# Altium PCB Smart Smoke Detector.PcbDoc
Units mm, origin at the board's own origin, x right, y up, seen from the top; angles counter-clockwise.
Board outline 55.7 x 68.7 mm, 2 copper layers (Top Layer, Bottom Layer); 40 components, 24 nets, 144 pads, 43 vias.
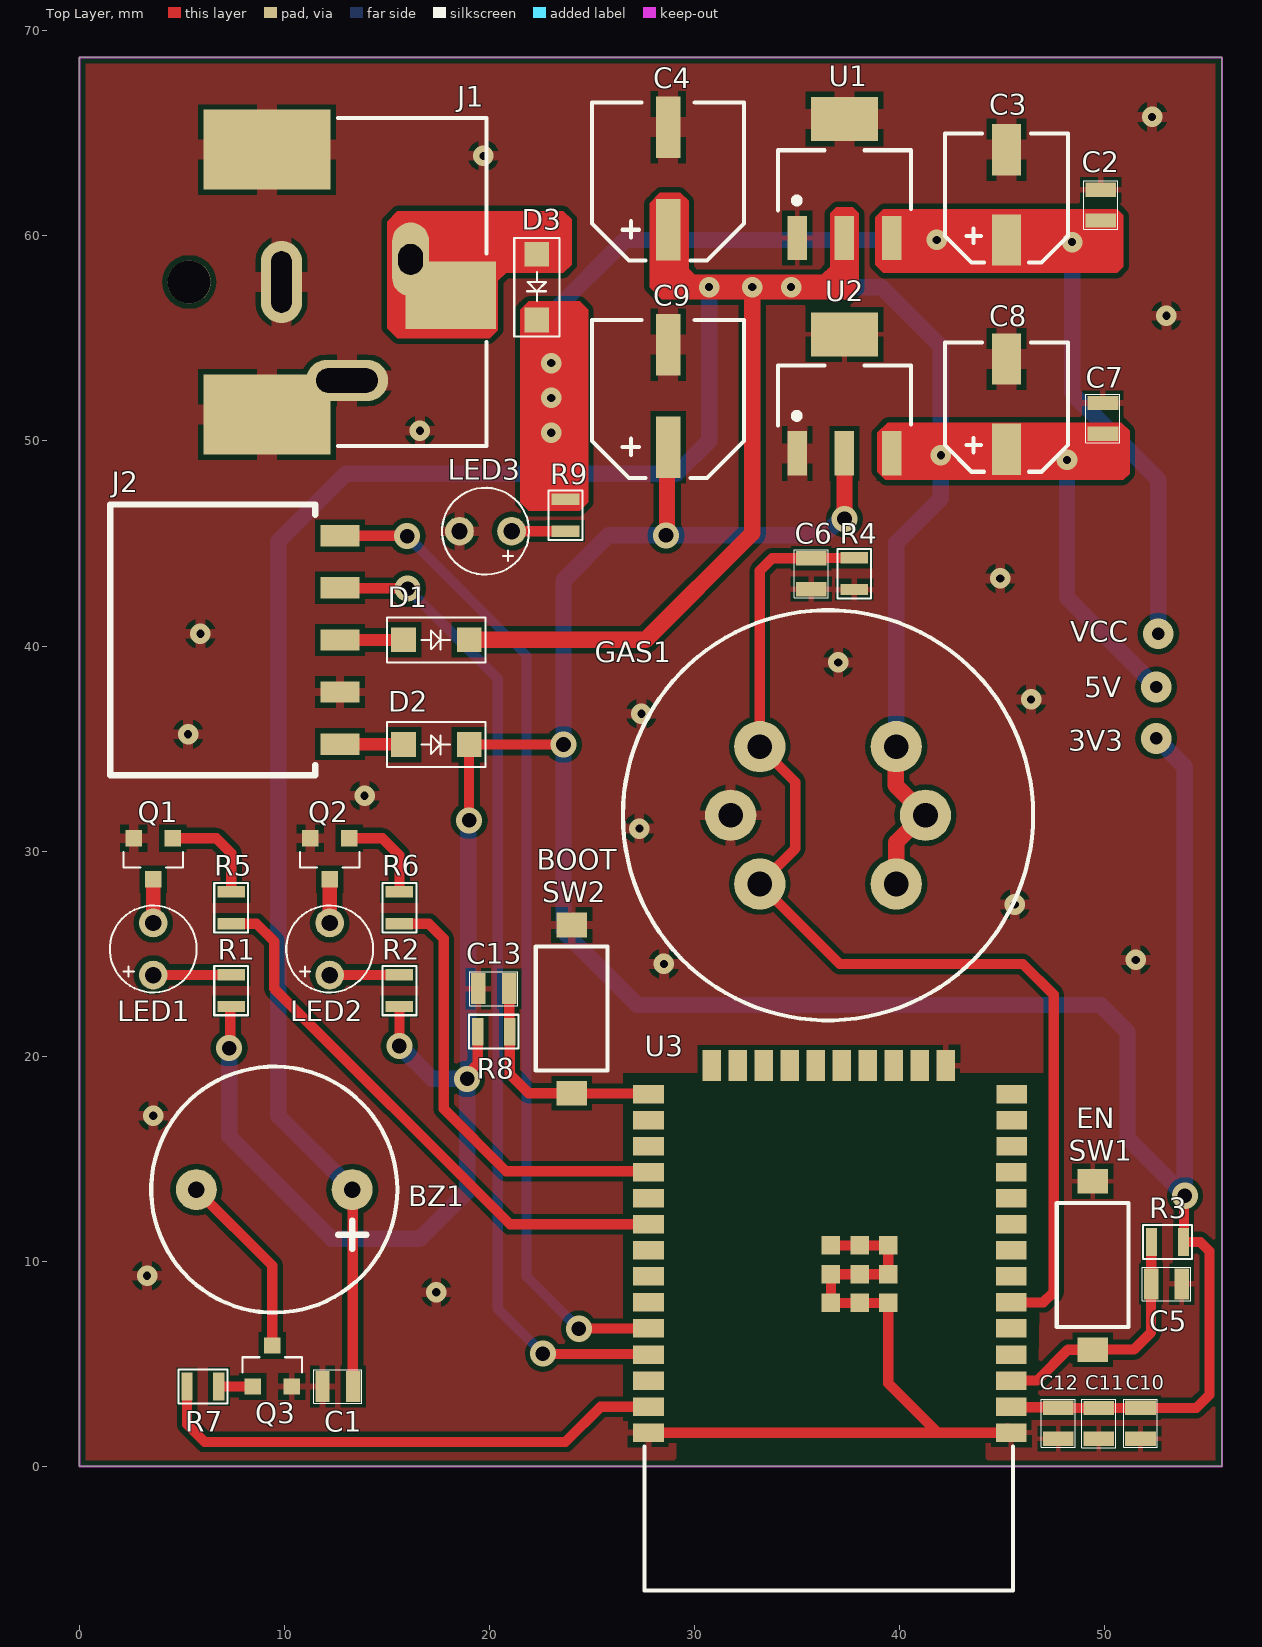
[diagram p0: Top Layer view]
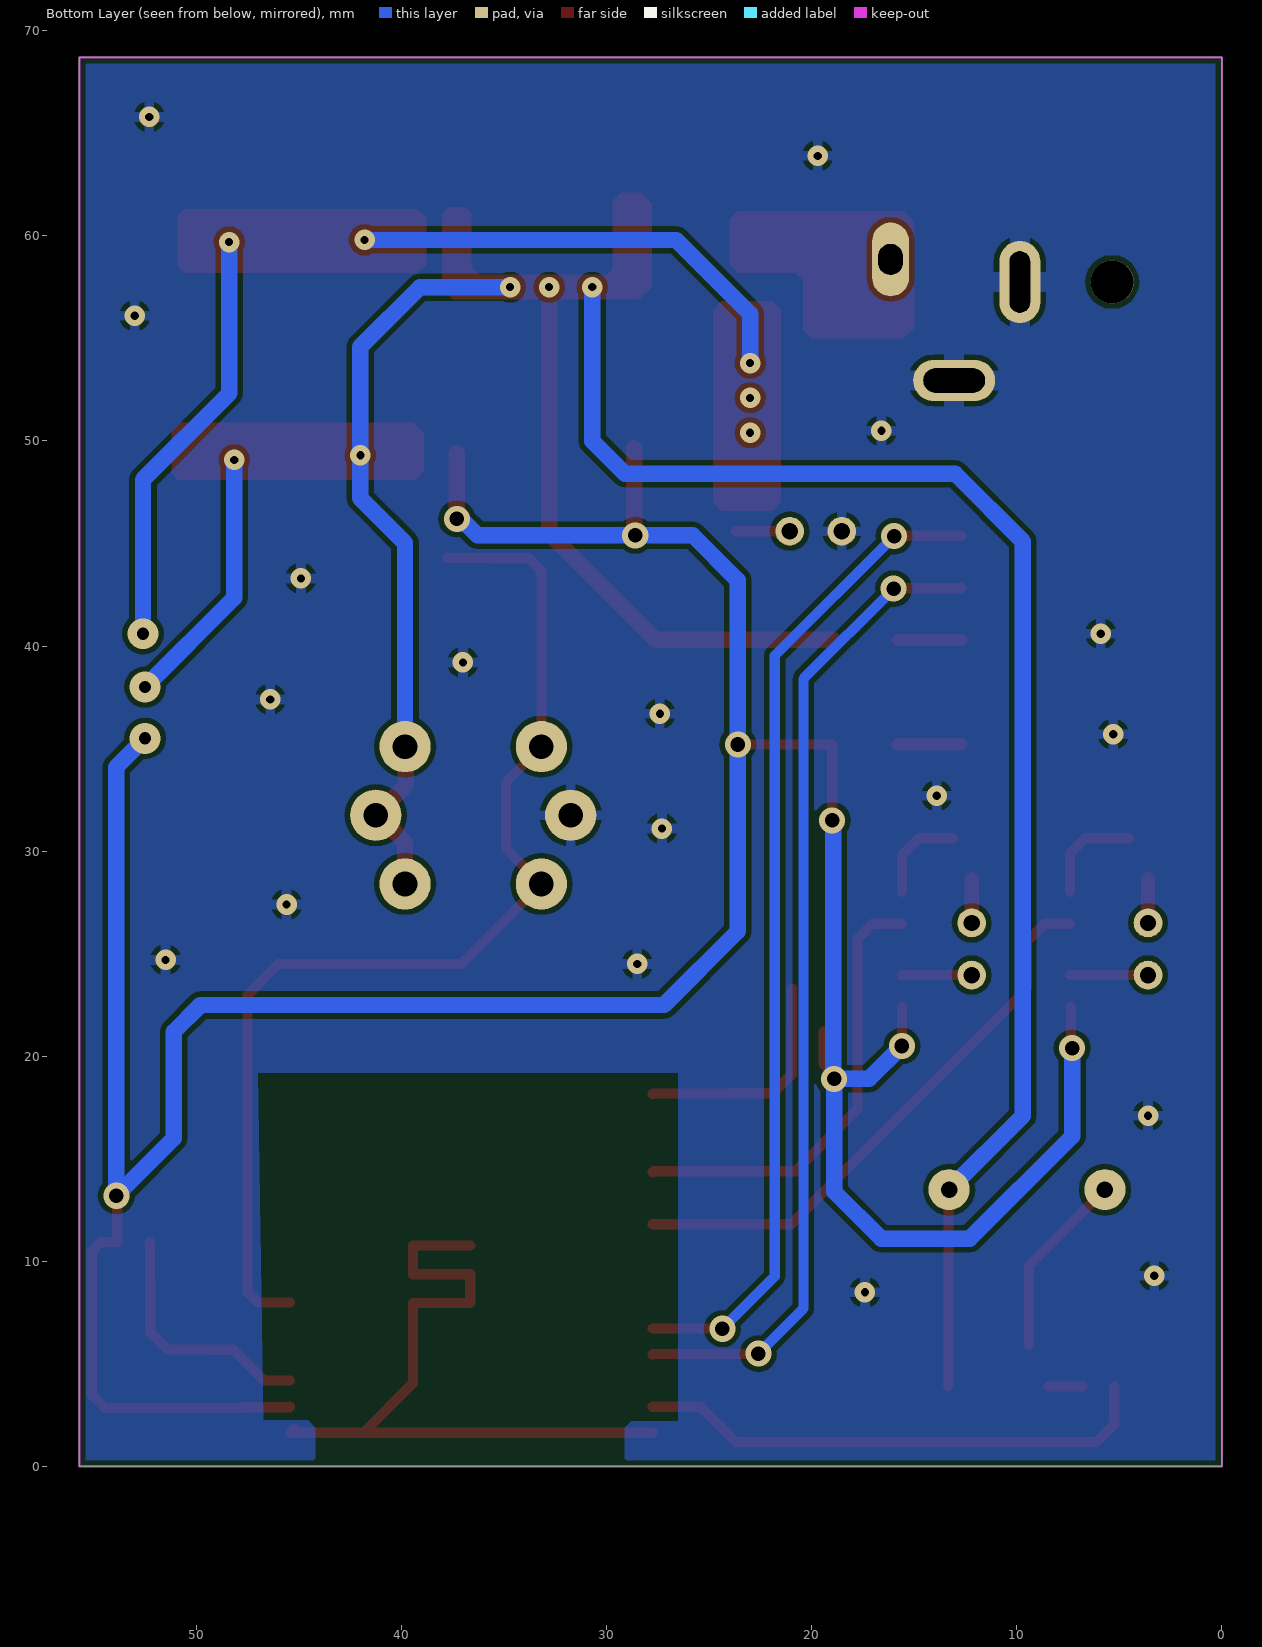
[diagram p1: Bottom Layer view, seen from below]
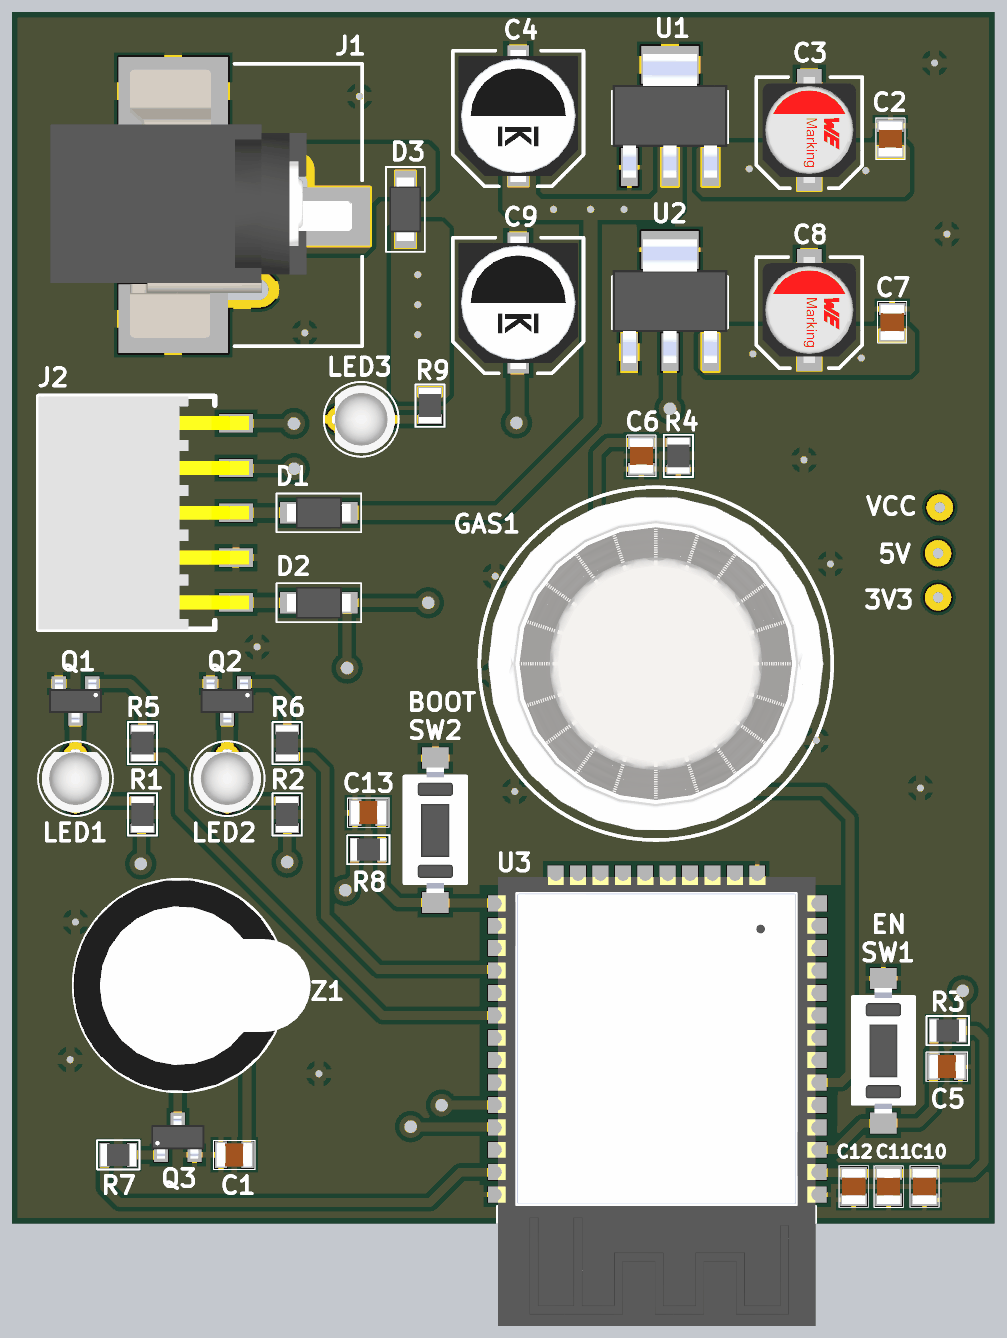
[diagram p2: 3D render of the assembled board from above, using the file's embedded part models]

## Layer stack, top to bottom
Top Solder: solder mask 0.0102, Solder Resist, Dk 3.5
Top Layer: signal copper 0.0356
Dielectric 1: dielectric 0.32, FR-4, Dk 4.8
Bottom Layer: signal copper 0.0356
Bottom Solder: solder mask 0.0102, Solder Resist, Dk 3.5

## Board outline
0,0 55.7,0 55.7,68.7 0,68.7

## Design rules (kind name [scope] priority, off if disabled: settings)
Clearance [All] p1: gap=0.254 ignorepadtopadclearanceinfootprint=FALSE except(0: Arc-Hole Track-Hole SMDPad-Hole THPad-Hole Via-Hole Fill-Hole Poly-Hole Region-Hole Text-Hole; 0.127: SMDPad-SMDPad)
PolygonConnect [All] p1: connectstyle=Relief reliefconductorwidth=0.254 reliefentries=4 polygonreliefangle="90 Angle" airgapwidth=0.254
RoutingVias [All] p1: holewidth=0.711 width=1.27 viastyle="Through Hole" minholewidth=0.711 minwidth=1.27 maxholewidth=0.711 maxwidth=1.27
SolderMaskExpansion [All] p1: expansion=0.102 istentingtop=FALSE
Width [All] p1: maxlimit=25 minlimit=0.5 preferedwidth=1 minimp=50.000000 maximp=50.000000 favimp=50.000000
30 further rules are at their usual default settings.

## Components (designator, comment, footprint, x,y, rotation, side; value= is the part's Value field where it differs from the comment)
BZ1 "AI-1223-TWT-3V-2-R" BUZZER 9.5,13.5 r180 top
C1 "CC0805KRX7R9BB104" "CAP 0805" 12.6,3.9 r0 top value=0.1uF
C2 "CC0805KRX7R9BB104" "CAP 0805" 49.8,61.5 r270 top value=0.1uF
C3 "875105359001" "CAP ALUM 10UF" 45.2,62 r90 top value=10uF
C4 "A766EB226M1DLAE060" "CAP ALUM 22UF" 28.7,62.8 r90 top value=22uF
C5 "CC0805KRX7R9BB104" "CAP 0805" 53,8.9 r180 top value=0.1uF
C6 "CC0805KRX7R9BB104" "CAP 0805" 35.678,43.528 r90 top value=0.1uF
C7 "CC0805KRX7R9BB104" "CAP 0805" 49.9,51.1 r270 top value=0.1uF
C8 "875105359001" "CAP ALUM 10UF" 45.2,51.8 r90 top value=10uF
C9 "A766EB226M1DLAE060" "CAP ALUM 22UF" 28.7,52.2 r90 top value=22uF
C10 "CC0805KKX5R8BB106" "CAP 0805" 51.732,2.106 r90 top value=10uF
C11 "CC0805KKX7R9BB105" "CAP 0805" 49.7,2.1 r270 top value=1uF
C12 "CC0805KRX7R9BB104" "CAP 0805" 47.719,2.106 r270 top value=0.1uF
C13 "CC0805KRX7R9BB104" "CAP 0805" 20.2,23.3 r0 top value=0.1uF
D1 "1N5819W" SOD-123F 17.4,40.3 r0 top
D2 "1N5819W" SOD-123F 17.4,35.2 r0 top
D3 "1N5819W" SOD-123F 22.3,57.5 r270 top
GAS1 "SEN-09404" MQ-4 36.5,31.75 r180 top value=MQ-4
J1 "PJ-036BH-SMT-TR" "POWER JACK" 11.725,57.75 r0 top
J2 "SMH-105-02-L-S" "SMD HEADER" 12.7,40.3 r270 top
LED1 "151031SS06000" "RED LED" 3.6,25.23 r90 top
LED2 "151031VS06000" "GREEN LED" 12.2,25.23 r90 top
LED3 "151031VS06000" "GREEN LED" 19.8,45.6 r180 top
Q1 "MMBT3904-7-F" SOT-23-3 3.6,29.63 r180 top
Q2 "MMBT3904-7-F" SOT-23-3 12.2,29.63 r180 top
Q3 "MMBT3904-7-F" SOT-23-3 9.4,4.9 r0 top
R1 "RMCF0805FT100R" "RES 0805" 7.4,23.2 r270 top value=100R
R2 "RMCF0805FT100R" "RES 0805" 15.6,23.2 r270 top value=100R
R3 "ERJ-6GEYJ103V" "RES 0805" 53.05,10.946 r0 top value=10K
R4 "ERJ-6GEYJ103V" "RES 0805" 37.778,43.528 r90 top value=10K
R5 "RC0805FR-071KL" "RES 0805" 7.4,27.241 r90 top value=1K
R6 "RC0805FR-071KL" "RES 0805" 15.6,27.241 r90 top value=1K
R7 "RMCF0805FT100R" "RES 0805" 6.025,3.9 r0 top value=100R
R8 "ERJ-6GEYJ103V" "RES 0805" 20.2,21.2 r180 top value=10K
R9 "RC0805FR-07330RL" "RES 0805" 23.699,46.378 r90 top value=330R
SW1 "PTS636 SK25F SMTR LFS" "TACTILE SWITCH" 49.401,9.8 r270 top
SW2 "PTS636 SK25F SMTR LFS" "TACTILE SWITCH" 24,22.3 r270 top
U1 "AMS1117-5.0" SOT-223 37.3,62.8 r0 top
U2 "AMS1117-3.3" SOT-223 37.3,52.3 r0 top
U3 "ESP32-WROOM-32E-H4" ESP32 36.6,10.6 r180 top value=ESP32-WROOM

## Footprints (in the part's own frame and the unit in brackets; to place one, negate y for a bottom-side part, rotate by r counter-clockwise, add the part's x,y. Pads: shape width x height; smd on the part's side, far side on the other; paste and mask are expansions set on the pad)
BUZZER [mm]
  round 2 hole 0.8 mask+0.05: 1(-3.8,0) 2(3.8,0)
  silkscreen extent -6,-6 6,6, body extent -7.43,-6 6.01,6, height 7.7
"CAP 0805" [mm]
  rect 0.7x1.5 smd mask+0.05: 1(-0.75,0) 2(0.75,0)
  silkscreen extent -1.17,-0.82 1.17,0.82, body extent -1,-0.67 1,0.67, height 1.22
"CAP ALUM 10UF" [mm]
  rect 2.5x1.4 smd mask+0.05: 1(-2.2,0) 2(2.2,0)
  silkscreen extent -3.3,-3 3,3, body extent -3,-2.65 3,2.65, height 5.8
"CAP ALUM 22UF" [mm]
  rect 3x1.2 smd mask+0.05: 1(-2.5,0) 2(2.5,0)
  silkscreen extent -4,-3.7 3.7,3.7, body extent -3.75,-3.4 3.75,3.4, height 6
ESP32 [mm]
  rect 1.5x0.9 smd mask+0.05: 1(-8.834,8.951) 2(-8.834,7.681) 3(-8.834,6.411) 4(-8.834,5.141) 5(-8.834,3.871) 6(-8.834,2.601) 7(-8.834,1.331) 8(-8.834,0.061) 9(-8.834,-1.209) 10(-8.834,-2.479) 11(-8.834,-3.749) 12(-8.859,-5.019) 13(-8.859,-6.289) 14(-8.859,-7.559) 25(8.859,-7.559) 26(8.859,-6.289) 27(8.859,-5.019) 28(8.859,-3.749) 29(8.859,-2.479) 30(8.859,-1.209) 31(8.859,0.061) 32(8.859,1.331) 33(8.859,2.601) 34(8.859,3.871) 35(8.859,5.141) 36(8.859,6.411) 37(8.859,7.681) 38(8.859,8.951)
  rect 0.9x1.5 smd mask+0.05: 15(-5.649,-8.951) 16(-4.379,-8.951) 17(-3.109,-8.951) 18(-1.839,-8.951) 19(-0.569,-8.951) 20(0.701,-8.951) 21(1.971,-8.951) 22(3.241,-8.951) 23(4.511,-8.951) 24(5.781,-8.951)
  rect 0.9x0.9 smd mask+0.05: ""(-2.839,2.624) ""(-2.839,-0.176) ""(-2.839,1.224) ""(-1.439,2.624) ""(-1.439,1.224) ""(-1.439,-0.176) ""(-0.039,2.624) ""(-0.039,1.224) ""(-0.039,-0.176)
  silkscreen extent -8.93,9.62 9.05,16.65, body extent -8.94,-9.06 9.06,16.44, height 3.25
"GREEN LED" [mm]
  round 1.4 hole 0.8 mask+0.102: 1(-1.27,0) 2(1.27,0)
  silkscreen extent -2.12,-2.12 2.12,2.12, body extent -1.92,-1.92 1.65,1.92, height 5.5
MQ-4 [mm]
  round 2.5 hole 1.2 mask+0.05: A1(-3.325,3.35) A2(-3.325,-3.35) B1(3.325,3.35) B2(3.325,-3.35) H1(-4.75,0) H2(4.75,0)
  silkscreen extent -10,-10 10,10, body extent -9.5,-9.51 9.5,9.48, height 15.5
"POWER JACK" [mm]
  oval 1.8x3.6 hole 1.2 slot 1.5 at 90 deg: 1(4.425,1.1)
  rect 4.4x3.3 smd: 1(6.375,-0.65)
  rect 6.2x3.9 smd: 2(-2.575,6.45) 3(-2.575,-6.45)
  oval 2x4 hole 1 slot 3 at 90 deg: 2(-1.875,0)
  oval 4x2 hole 1.2 slot 3 at 0 deg: 3(1.325,-4.8)
  round 2.1 hole 2.1 unplated: ""(-6.375,0)
  silkscreen extent 0.89,-8 8.13,8, body extent -9.54,-7.53 7.56,7.67, height 11
"RED LED" [mm]
  round 1.4 hole 0.8 mask+0.102: 1(-1.27,0) 2(1.27,0)
  silkscreen extent -2.12,-2.12 2.12,2.12, body extent -1.92,-1.92 1.65,1.92, height 5.5
"RES 0805" [mm]
  rect 0.55x1.35 smd mask+0.05: 1(-0.775,0) 2(0.775,0)
  silkscreen extent -1.2,-0.82 1.2,0.82, body extent -1,-0.63 1,0.63, height 0.6
"SMD HEADER" [mm]
  rect 1.04x1.91 smd mask+0.05: 1(-5.08,0) 2(-2.54,0) 3(0,0) 4(2.54,0) 5(5.08,0)
  silkscreen extent -6.6,-11.2 6.6,-1.2, body extent -6.6,-11.21 6.6,0.73, height 2.41
SOD-123F [mm]
  rect 1.2x1.2 smd mask+0.05: 1(-1.6,0) 2(1.6,0)
  silkscreen extent -2.4,-1.1 2.4,1.1, body extent -1.8,-0.9 1.8,0.9, height 1.1
SOT-23-3 [mm]
  rect 0.8x0.8 smd mask+0.05: 1(-0.95,-1) 2(0.95,-1) 3(0,1)
  silkscreen extent -1.45,-0.33 1.45,0.43, body extent -1.5,-1.21 1.5,1.21, height 1.12
SOT-223 [mm]
  rect 0.95x2.15 smd mask+0.102: 1(-2.3,-2.9) 2(0,-2.9) 3(2.3,-2.9)
  rect 3.25x2.15 smd mask+0.102: 1(0,2.9)
  silkscreen extent -3.25,-1.55 3.25,1.38, body extent -3.25,-3.5 3.25,3.5, height 1.8
"TACTILE SWITCH" [mm]
  rect 1.2x1.5 smd mask+0.05: 1(-4.1,0) 2(4.1,0)
  silkscreen extent -3.05,-1.75 3,1.75, body extent -3.55,-1.75 3.55,1.75, height 4.3

## Part data
BZ1: library part "BUZZER TH", "BUZZER MAGNETIC 3V 12MM TH"
C1 C2 C5 C6 C7 C12 C13: library part "CAP CER 0.1UF 0805 SMD", "CAP CER 0.1UF 50V X7R 0805"
C3 C8: library part "CAP ALUM 10UF SMD", "CAP ALUM 10UF 20% 16V SMD"
C4 C9: library part "CAP ALUM 22UF SMD", "CAP ALUM 22UF 20% 20V SMD"
C10: library part "CAP CER 10UF 0805 SMD", "CAP CER 10UF 25V X5R 0805"
C11: library part "CAP CER 1UF 0805 SMD", "CAP CER 1UF 50V X7R 0805"
D1 D2 D3: library part "SCHOTTKY DIODE SMD", "DIODE SCHOTTKY 40V 1A SOD-123F"
GAS1: library part "MQ-4 SENSOR", "SENSOR METHANE 2.5V-4 V OUTPUT"
J1: library part "POWER JACK SMD", "PWR JACK 2.5X5.5MM SOLDER"
J2: library part "HEADER 5POS SMD", "FEMALE HEADER 5POS 2.54MM"
LED1: library part "LED RED TH", "LED RED 3MM ROUND T/H"
LED2 LED3: library part "LED GREEN TH", "LED GREEN 3MM ROUND T/H"
Q1 Q2 Q3: library part "NPN TRANSISTOR SMD", "TRANS NPN 40V 0.2A SOT23-3"
R1 R2 R7: library part "RES 100 OHM 0805 SMD", "RES 100 OHM 1% 1/8W 0805"
R3 R8: library part "RES 10K OHM 0805 SMD", "RES 10K OHM 5% 1/8W 0805"
R4: library part "RES 10K OHM 0805 SMD", "RES SMD 10K OHM 5% 1/8W 0805"
R5 R6: library part "RES 1K OHM 0805 SMD", "RES 1K OHM 1% 1/8W 0805"
R9: library part "RES 330 OHM 0805 SMD", "RES 330 OHM 1% 1/8W 0805"
SW1 SW2: library part "TACTILE SWITCH SMD", "SWITCH TACTILE 0.05A 12V"
U1: library part "LDO REG 5V 1A SMD", "IC LDO REG 5V 1A SOT223"
U2: library part "LDO REG 3V3 1A SMD", "IC LDO REG 3.3V 1A SOT223"
U3: library part ESP32-WROOM-32E, "RF TXRX MOD BT WIFI TH SMD"

## Via types
v1: diameter 1, hole 0.4, Top Layer to Bottom Layer, tented both sides, 28 vias
v2: diameter 1.27, hole 0.711, Top Layer to Bottom Layer, tented both sides, 12 vias
v3: diameter 1.5, hole 0.6, Top Layer to Bottom Layer, 3 vias

## Nets (pads, with @x,y where several pads share a name; then routed paths per layer and width w, separated by ;. In a path a pad name is that pad's centre, name@x,y a point inside that pad or via, vN(x,y) a via of type N, cw(c..) or ccw(c..) an arc to the next point about the centre after c; other vN are vias at no path point)
3V3: C9.1 C10.2 C11.1 C12.1 D2.2 R1.2 R2.2 R3.2 R8.2 U2.2 U3.2 | length 177.7
  Top Layer w0.5: v2(7.3,20.4) 7.35,20.45 7.35,22.4 7.375,22.425 R1.2 ; v2(15.6,20.5) R2.2 ; v2(18.9,18.9) 18.9,19.108 19.425,19.633 R8.2 ; v2(19,31.5) D2.2 v2(23.6,35.2) ; v2(28.6,45.4) v2@28.65,45.45 ; C9.1@28.65,49.65 C9.1 ; U3.2 45.465,2.887 47.687,2.887 C12.1 47.722,2.853 49.697,2.853 C11.1 49.703,2.853 54.453,2.853 55.1,3.5 55.1,10.5 54.654,10.946 R3.2 53.85,10.971 53.85,13.15 v2(53.9,13.2)
  Top Layer w0.8: v2@28.65,45.45 C9.1@28.65,49.65 ; v2(37.3,46.2) U2.2
  Bottom Layer w0.8: v2(7.3,20.4) 7.3,16.1 12.3,11.1 16.6,11.1 18.9,13.4 v2(18.9,18.9) ; v2(15.6,20.5) 17.2,18.9 v2(18.9,18.9) ; v2(19,31.5) 18.95,31.45 18.95,18.95 v2(18.9,18.9) ; v2(37.3,46.2) 37.092,46.2 36.292,45.4 v2(28.6,45.4) 25.8,45.4 23.6,43.2 v2(23.6,35.2) 23.6,26.1 27.2,22.5 49.8,22.5 51.1,21.2 51.1,16 v2(53.9,13.2) 53.9,34.1 v3(52.5,35.5)
5V: BZ1.1 C1.2 C4.1 C7.2 C8.1 D1.2 GAS1.A1 GAS1.A2 GAS1.H1 U1.2 U2.3 | length 150.9
  Top Layer w0.5: BZ1.1 13.325,13.475 13.325,3.925 C1.2
  Top Layer w0.8: D1.2 27.6,40.3 32.8,45.5 v1(32.8,57.5) ; GAS1.A1 39.825,30.432 41.143,31.75 GAS1.H1 39.795,33.205 39.795,35.07 GAS1.A2
  Bottom Layer w0.8: BZ1.1 9.7,17.1 9.7,45.1 13,48.4 29.1,48.4 30.7,50 v1(30.7,57.5) ; v1(34.7,57.5) 39.1,57.5 42,54.6 v1(42,49.3) 42,47.2 39.825,45.025 GAS1.A2 ; v1(48.15,49.075) 48.15,42.35 v3(52.5,38)
BUZZER: R7.1 U3.37 | length 25.4
  Top Layer w0.5: R7.1 5.25,2.05 6.1,1.2 23.7,1.2 25.419,2.919 U3.37
EN: C5.2 R3.1 SW1.2 U3.3 | length 12.2
  Top Layer w0.5: U3.3 46.689,4.189 48.193,5.693 49.394,5.693 SW1.2 51.4,5.7 52.25,6.55 C5.2 52.263,8.913 52.263,10.934 R3.1
G_LED: R6.1 U3.28 | length 22
  Top Layer w0.5: R6.1 17.034,26.466 17.761,25.739 17.761,17.439 20.8,14.4 27.69,14.4 U3.28
GND: C1.1 C2.1 C3.2 C4.2 C5.1 C6.1 C7.1 C8.2 C9.2 C10.1 C11.2 C12.2 C13.1 GAS1.H2 J1.2 J1.3 J2.4 LED3.2 Q1.2 Q2.2 Q3.2 R4.1 SW1.1 SW2.1 U1.1 U2.1 U3. U3.1 U3.15 U3.38 | length 36.5
  Top Layer w0.5: U3.38 41.851,1.649 ; U3.@36.639,10.776 38.039,10.776 39.439,10.776 39.439,9.376 38.039,9.376 36.639,9.376 36.639,7.976 38.039,7.976 39.439,7.976 39.439,4.061 41.851,1.649 ; U3.1@45.234,1.849 U3.1 45.234,1.649 44.591,1.649 41.851,1.649
  other v1: 17.4,8.5 3.3,9.3 3.6,17.1 28.5,24.5 51.5,24.7 45.6,27.4 27.3,31.1 13.9,32.7 5.3,35.7 27.4,36.7 46.4,37.4 37,39.2 5.9,40.6 44.9,43.3 16.6,50.5 53,56.1 19.7,63.9 52.3,65.8
IO0: C13.2 R8.1 SW2.2 U3.25 | length 11.4
  Top Layer w0.5: C13.2 20.962,23.287 20.962,21.212 R8.1 20.975,19.125 21.9,18.2 SW2.2 24.021,18.18 27.721,18.18 U3.25
NetBZ1_2: BZ1.2 Q3.3 | length 9.1
  Top Layer w0.5: BZ1.2 9.4,9.8 Q3.3
NetD1_1: D1.1 J2.3 | length 3.1
  Top Layer w0.6: J2.3 D1.1
NetD2_1: D2.1 J2.5 | length 3.1
  Top Layer w0.6: J2.5 12.71,35.21 15.79,35.21 D2.1
NetD3_1: D3.1 J1.1
NetLED1_1: LED1.1 R1.1 | length 3.8
  Top Layer w0.5: LED1.1 3.607,23.968 7.392,23.968 R1.1
NetLED1_2: LED1.2 Q1.3 | length 2.1
  Top Layer w0.7: LED1.2 Q1.3
NetLED2_1: LED2.1 R2.1 | length 3.4
  Top Layer w0.5: LED2.1 12.207,23.968 15.593,23.968 R2.1
NetLED2_2: LED2.2 Q2.3 | length 2.1
  Top Layer w0.7: LED2.2 Q2.3
NetLED3_1: LED3.1 R9.1 | length 2.6
  Top Layer w0.5: LED3.1 21.072,45.602 23.697,45.602 R9.1
NetQ1_1: Q1.1 R5.2 | length 5
  Top Layer w0.5: Q1.1 6.67,30.63 7.4,29.9 R5.2
NetQ2_1: Q2.1 R6.2 | length 4.6
  Top Layer w0.5: Q2.1 14.77,30.63 15.6,29.8 R6.2
NetQ3_1: Q3.1 R7.2 | length 1.6
  Top Layer w0.5: R7.2 Q3.1
R_LED: R5.1 U3.30 | length 27.8
  Top Layer w0.5: R5.1 8.634,26.466 9.5,25.6 9.5,23.3 20.991,11.809 U3.30
RXD0: J2.1 U3.34 | length 48.8
  Top Layer w0.5: J2.1 15.96,45.38 v2(15.98,45.36) ; v2(24.354,6.715) 24.36,6.722 27.734,6.722 U3.34
  Bottom Layer w0.5: v2(15.98,45.36) 21.8,39.54 21.8,9.269 v2(24.354,6.715)
SENSOR: C6.2 GAS1.B1 GAS1.B2 R4.2 U3.6 | length 54.9
  Top Layer w0.5: R4.2 37.765,44.29 35.69,44.29 C6.2 33.778,44.278 33.175,43.675 GAS1.B2 34.9,33.375 34.9,30.125 GAS1.B1 37.075,24.5 46,24.5 47.5,23 47.5,8.5 46.999,7.999 U3.6
TXD0: J2.2 U3.35 | length 48.5
  Top Layer w0.5: J2.2 12.72,42.82 15.98,42.82 v2(16,42.8) ; v2(22.6,5.5) 22.621,5.479 27.721,5.479 U3.35
  Bottom Layer w0.5: v2(16,42.8) 20.4,38.4 20.4,7.7 v2(22.6,5.5)
VCC: C2.2 C3.1 D3.2 R9.2 U1.3 | length 43.5
  Bottom Layer w0.8: v1(23,53.8) 23,56.2 26.6,59.8 v1(41.8,59.8) ; v1(48.4,59.7) 48.4,52.318 52.6,48.118 v3(52.6,40.6)
  other v1: 23,50.4 23,52.1
pads on no net: J1. U3.4 U3.5 U3.7 U3.8 U3.9 U3.10 U3.11 U3.12 U3.13 U3.14 U3.16 U3.17 U3.18 U3.19 U3.20 U3.21 U3.22 U3.23 U3.24 U3.26 U3.27 U3.29 U3.31 U3.32 U3.33 U3.36

## Polygon pours and split planes (outlines as drawn)
GND on Bottom Layer (solid, remove dead copper, pour order 5): 0.1,0.1 28.8,0.1 29.1,0.4 29.1,1.9 28.8,2.2 26.5,2.2 26.5,19.2 47,19.2 46.734,2.244 44.544,2.244 44.2,1.9 44.2,0.4 44.5,0.1 55.6,0.1 55.6,68.6 0.1,68.6
GND on Top Layer (solid, remove dead copper, pour order 6): 0.1,0.1 28.8,0.1 29.1,0.4 29.1,1.9 28.8,2.2 26.5,2.2 26.5,19.2 47,19.2 46.734,2.244 44.544,2.244 44.2,1.9 44.2,0.4 44.5,0.1 55.6,0.1 55.6,68.6 0.1,68.6

## Keep-outs
Keep-Out Layer:
  lines w0.1: 0,0 25,0 43.9,0 55.7,0 55.7,68.7 0,68.7 0,0

## Other copper
Top Layer:
  region net 5V: 27.8,61.6 28.3,62.1 29.3,62.1 29.7,61.7 29.7,58.4 30,58.1 36.2,58.1 36.6,58.5 36.6,61.1 36.9,61.4 37.7,61.4 38,61.1 38,57.4 37.5,56.9 28.4,56.9 27.8,57.5
  region net 5V: 38.9,50.4 39.4,50.9 50.8,50.9 51.2,50.5 51.2,48.4 50.9,48.1 39.3,48.1 38.9,48.5
  region net VCC: 38.8,60.9 39.2,61.3 50.6,61.3 50.9,61 50.9,58.5 50.6,58.2 39.2,58.2 38.8,58.6 38.8,60.3
  region net VCC: 21.5,56.4 21.9,56.8 24.4,56.8 24.8,56.4 24.8,47 24.4,46.6 21.9,46.6 21.5,47
  region net NetD3_1: 15,55.5 15.5,55 20,55 20.4,55.4 20.4,57.8 20.8,58.2 23.6,58.2 24,58.6 24,60.8 23.6,61.2 15.5,61.2 15,60.7

## Silkscreen, mask and mechanical layers (free items; w line width, h text height)
Top Overlay:
  text "VCC" at 48.3,40.2 h1
  text "5V" at 49,37.5 h1
  text "3V3" at 48.2,34.9 h1
  text "BOOT" at 22.3,29.1 h1
  text "EN" at 48.6,16.5 h1